# Altium PCB pdb v2.PcbDoc (part 2 of 2)
Units mm, origin at the board's own origin, x right, y up, seen from the top; angles counter-clockwise.
Board outline 131 x 84.21 mm, 4 copper layers (Top Layer, GND, PWR, Bottom Layer); 111 components, 116 nets, 518 pads, 333 vias.
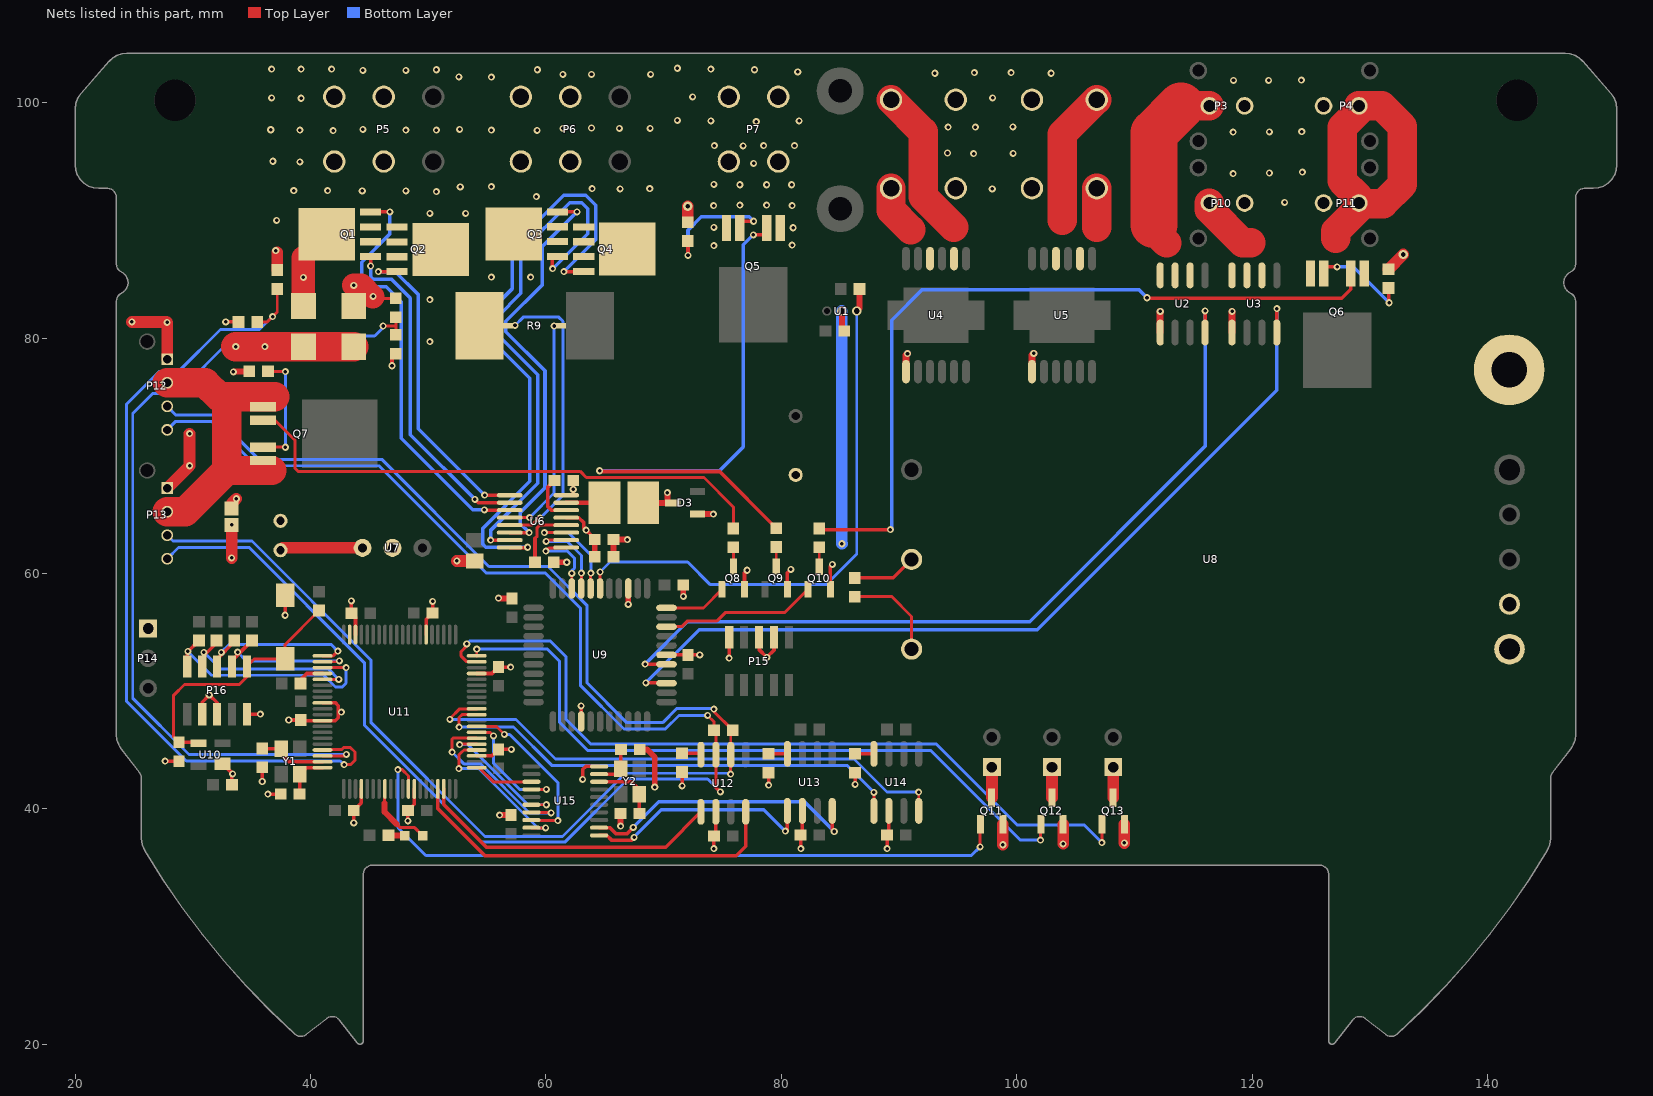
[diagram p4: the nets of this part, all layers, seen from the top]

## Via types
v1: diameter 0.6, hole 0.3, Top Layer to Bottom Layer, 329 vias
v2: diameter 0.8, hole 0.4, Top Layer to Bottom Layer, 2 vias
v3: diameter 3, hole 2, Top Layer to Bottom Layer, 2 vias

## Nets (pads, with @x,y where several pads share a name; then routed paths per layer and width w, separated by ;. In a path a pad name is that pad's centre, name@x,y a point inside that pad or via, vN(x,y) a via of type N, cw(c..) or ccw(c..) an arc to the next point about the centre after c; other vN are vias at no path point) (continued)
EN6: Q8.1 U9.22 | length 5.4
  Top Layer w0.25: U9.22@70.25,57.075 73.4,57.075 Q8.1@74.975,58.65
EN7: Q10.1 U9.20 | length 13.3
  Top Layer w0.25: U9.20@70.25,55.475 71.55,55.475 72.05,55.975 74.554,55.975 75.275,56.696 80.321,56.696 Q10.1@82.275,58.65
EN8: U2.4 U9.16 | length 70.4
  Top Layer w0.3: v1@68.45,52.275 U9.16@70.25,52.275 ; U2.4@116.005,80.475 v1(116.005,82.305)
  Bottom Layer w0.3: v1@68.412,52.312 68.4,52.3 v1(68.425,52.3) 72.025,55.9 101.105,55.9 116.005,70.8 v1(116.005,82.305)
EN9: U3.4 U9.14 | length 74.6
  Top Layer w0.3: v1(68.5,50.7) 70.225,50.7 U9.14@70.25,50.675 ; U3.4@122.105,80.475 v1(122.105,82.495)
  Bottom Layer w0.3: v1(68.5,50.7) 73.025,55.225 101.755,55.225 122.105,75.575 v1(122.105,82.495)
GND: C1.2 C2.1 C4.1 C5.2 C6.2 C7.1 C8.1 C9.2 C10.2 C11.2 C12.2 C13.2 C14.2 C15.2 C16.2 C17.2 C18.2 C19.2 C20.2 C21.2 C22.2 C23.2 C24.2 C25.2 C26.2 C27.2 C28.2 D3.1 NT1.1 P14.1 P15.3 P15.5 P15.9 P16.3 P16.5 P16.9 Q8.2 Q9.2 Q10.2 R23.1 R24.1 R25.1 S1.1 U1.2 U6.8 U7.2 U9.4 U9.17 U9.25 U10.1 U11.9 U11.12 U11.24 U11.33 U11.43 U11.57 U11.66 U11.78 U12.2 U13.2 U14.2 U15.10 | length 110.7
  Top Layer w0.3: v1(27.65,44.05) C16.2@28.825,44.05 ; P16.3@30.794,48.05 30.794,49.069 v1(31.4,49.675) 32.063,49.012 P16.5@32.063,48.05 ; U10.1@32.525,43.84 33.325,43.04 C20.2@33.325,42.05 ; P16.9@34.6,48.05 v1(35.75,48.05) ; v1(35.9,42.325) C18.2@35.9,43.525 ; v1(36.375,41.25) C21.2@37.475,41.25 ; v1(37.85,56.45) S1.1@37.85,58.15 ; v1(38.15,47.55) C14.2@39.175,47.55 ; C14.2@39.225,47.5 U11.12@41.025,47.5 42.1,47.5 42.35,47.75 42.35,48.775 42.125,49 U11.9@41.025,49 ; v1(43.475,57.675) C10.2@43.475,56.625 43.825,56.275 U11.78@43.825,54.8 ; v1(43.675,38.8) C22.2@43.675,39.85 44.325,40.5 U11.24@44.325,41.7 ; v1(48.277,38.977) 48.277,38.827 48.275,38.825 C23.2@48.275,39.85 48.825,40.4 U11.33@48.825,41.7 ; U11.66@49.825,54.8 49.825,56.1 C11.2@50.375,56.65 v1(50.375,57.625) ; U11.43@54.125,44.5 55.425,44.5 C19.2@55.975,45.05 v1(57.075,45.05) ; U11.57@54.125,51.5 55.425,51.5 C15.2@55.975,52.05 v1(57,52.05) ; U6.8@61.725,66.647 62.323,66.647 62.325,66.65 C2.1@62.325,67.9 ; U9.4@63,47.425 v1(63,48.75) ; v1(63.125,42.5) 63.125,43.35 63.375,43.6 U15.10@64.525,43.6 ; U9.17@70.25,53.075 v1(73.075,53.075) ; v1(71.575,41.95) R23.1@71.575,43.125 ; v1(74.275,36.625) C26.2@74.275,37.7 74.44,37.865 U12.2@74.44,39.75 ; v1(75.575,52.8) P15.9@75.575,54.575 ; Q8.2@76.875,58.65 76.875,60.05 v1(77.1,60.275) ; P15.5@78.112,54.575 78.112,53.538 v1(78.775,52.875) 79.381,53.481 P15.3@79.381,54.575 ; v1(78.925,42.025) R24.1@78.925,43.075 ; Q9.2@80.525,58.65 80.525,60.05 v1(80.825,60.35) ; v1(81.675,36.625) 81.675,37.825 81.79,37.94 U13.2@81.79,39.825 ; Q10.2@84.175,58.65 84.175,60.6 v1(84.35,60.775) ; v1(86.275,42.075) R25.1@86.275,43.075 ; v1(89,36.625) 89,37.8 89.14,37.94 U14.2@89.14,39.825
  Top Layer w0.5: v1(55.975,57.9) 56,57.875 C12.2@57.125,57.875 ; v1(56.075,39.475) C24.2@57.025,39.475 ; C7.1@60.675,60.95 v1(61.775,60.95) ; C8.1@65.75,61.425 C4.1@65.75,62.875 v1(66.925,62.875) ; v1(66.35,38.525) C25.2@66.35,39.6 ; v1(67,57.375) U9.25@67,58.725 ; C17.2@67.975,45.05 68.6,45.05 69.25,44.4 v1(69.25,41.85) ; v1(71.675,58.05) C9.2@71.675,59.025 ; D3.1@72.875,65.05 v1(74.225,65.05) ; C1.2@85.145,80.805 U1.2@85.145,82.3
  Top Layer w1: v1(33.3,61.325) v1(33.3,64.125) ; v1(52.436,61.064) C6.2@53.95,61.064
  Bottom Layer w1: U1.2@85.145,82.3 85.145,62.53 v1(85.15,62.525)
  other v1: 33.375,42.975 42.625,48.225 62.325,67.15
MCU_JTAG.TCK: P16.4 R15.1 U11.5 | length 16.3
  Top Layer w0.25: U11.5@41.025,51 v1(42.4,51)
  Top Layer w0.3: P16.4@30.794,52.1 30.794,52.869 R15.1@32.025,54.1
  Bottom Layer w0.25: v1(30.95,53.3) 32.35,51.9 41.5,51.9 v1(42.4,51)
MCU_JTAG.TDI: P16.8 R17.1 U11.2 | length 13.3
  Top Layer w0.25: U11.2@41.025,52.5 42.375,52.5 v1(42.45,52.575)
  Top Layer w0.3: P16.8@33.331,52.1 33.331,52.606 R17.1@35.025,54.3
  Bottom Layer w0.25: v1(33.8,53.325) 34.55,52.575 v1(42.45,52.575)
MCU_JTAG.TDO: P16.6 R16.1 U11.1 | length 14.6
  Top Layer w0.25: U11.1@41.025,53 41.925,53 v1(42.325,53.4)
  Top Layer w0.3: P16.6@32.063,52.1 32.063,52.738 R16.1@33.525,54.2
  Bottom Layer w0.25: v1(32.425,53.3) 33.075,53.95 41.775,53.95 v1(42.325,53.4)
MCU_JTAG.TMS: P16.2 R14.1 U11.3 | length 20.8
  Top Layer w0.25: U11.3@41.025,52 42.688,52 v1(43.025,52)
  Top Layer w0.3: P16.2@29.525,52.1 29.525,53.3 R14.1@30.525,54.3
  Bottom Layer w0.25: v1(29.575,53.375) 31.6,51.35 41.125,51.35 42.125,50.35 42.7,50.35 43.025,50.675 v1(43.025,52)
NetC5_1: C4.2 C5.1 C8.2 D1.2 D2.2 D3.2 L1.1 U6.5 U7.1 | length 25.6
  Top Layer w0.3: U6.5@61.725,64.742 62.807,64.742 63.2,64.35 63.2,63.9 C4.2@64.15,62.95
  Top Layer w0.5: C8.2@64.15,61.425 C4.2@64.15,62.875 C4.2@64.15,62.95 ; L1.1@68.275,66 D3.2@70.775,66 70.325,66 v1(70.325,66.875)
  Top Layer w1: C5.1@37.65,62.175 U7.1@44.425,62.175
  Top Layer w2.5: v1(33.65,79.275) D2.2@43.675,79.275
  other v1: 63.42,63.68 36.125,79.275
NetC9_2: C2.2 U6.6 | length 4.1
  Top Layer w0.3: C2.2@60.725,67.9 60.175,67.35 60.175,65.675 60.473,65.377 U6.6@61.725,65.377
NetC10_2: C7.2 U6.4 | length 5.6
  Top Layer w0.25: 59.075,62.975 59.263,63.163 59.263,63.887 59.482,64.107 U6.4@61.725,64.107
  Top Layer w0.3: C7.2@59.075,60.95 59.075,62.975
NetC29_1: C21.1 U11.20 Y1.2 | length 3.8
  Top Layer w0.3: C21.1@39.1,41.275 Y1.2@39.1,42.925 39.675,43.5 U11.20@41.025,43.5
NetC30_1: C18.1 U11.19 Y1.1 | length 5.4
  Top Layer w0.3: C18.1@35.9,45.125 Y1.1@37.5,45.125 ; Y1.1@37.5,44.65 38.15,44 U11.19@41.025,44
NetD16_1: D4.1 R26.1 | length 1.4
  Top Layer w0.5: R26.1@46.65,37.725 D4.1@48.025,37.725
NetL3_2: L1.2 U6.7 | length 3.3
  Top Layer w0.35: U6.7@61.725,66.012 64.963,66.012 L1.2@64.975,66
NetP3_1: P17.1 Q11.1 | length 2.6
  Top Layer w1: Q11.1@97.9,40.975 P17.1@97.9,43.55
NetP5_2: P12.2 P13.2 Q7.1 Q7.5 | length 25.6
  Top Layer w2.5: P13.2@27.825,65.25 29.375,65.25 32.875,68.75 ; P12.2@27.825,76.2 31.05,76.2 32.225,75.025 36.975,75.025 ; 32.875,74.375 32.875,68.75 ; 36.725,68.75 32.875,68.75
NetP5_3: P12.3 P13.3 R20.2 U12.6 | length 131.8
  Top Layer w0.25: v1(74.268,48.468) 74.268,48.282 R20.2@75.875,46.675 ; v1(75.7,42.95) U12.6@75.7,44.59 ; U12.6@75.71,44.6 R20.2@75.71,46.51
  Bottom Layer w0.25: P13.3@27.825,63.25 28.325,62.75 35.025,62.75 45.125,52.65 45.125,47.35 54.823,37.652 61.403,37.652 66.776,43.025 75.625,43.025 v1(75.7,42.95) ; P12.3@27.825,74.2 28.55,73.475 31.825,73.475 35.6,69.7 46.053,69.7 55.153,60.6 60.178,60.6 63.475,57.303 63.475,50.725 66.875,47.325 69.922,47.325 71.11,48.512 74.223,48.512 v1(74.268,48.468)
NetP5_4: P12.4 P13.4 R20.1 U12.7 | length 131.6
  Top Layer w0.25: v1(73.738,47.937) 74.275,47.4 R20.1@74.275,46.675 ; R20.1@74.44,46.51 U12.7@74.44,44.6 74.44,41.835 v1(74.825,41.45)
  Bottom Layer w0.25: P13.4@27.825,61.25 28.775,62.2 34.797,62.2 44.575,52.422 44.575,47.122 54.497,37.2 61.65,37.2 66.975,42.525 73.75,42.525 v1(74.825,41.45) ; P12.4@27.825,72.2 28.55,72.925 31.597,72.925 35.372,69.15 45.825,69.15 54.925,60.05 59.95,60.05 62.925,57.075 62.925,50.497 66.647,46.775 70.15,46.775 71.312,47.937 v1(73.738,47.937)
NetP8_2: P4.2 P11.2 Q6.1 Q6.5 | length 27
  Top Layer w2.5: 127.125,88.475 127.125,89.1 129.075,91.05 129.075,91.925 127.65,93.35 127.65,97.9 129.075,99.325 P4.2@129.075,99.725 131.025,99.725 132.775,97.975 132.775,93.05 131.15,91.425 P11.2@129.075,91.425
NetP9_2: P7.2 P7.4 Q5.1 Q5.5
  other v1: 74.275,87.85 80.925,87.9 81,89.375 74.275,89.4 74.25,91.25 80.925,91.25 76.475,91.3 78.75,91.3 76.475,93.025 78.75,93.025 80.875,93.025 74.275,93.05 77.65,94.85 76.75,96.325 74.325,96.35 78.5,96.35 81.125,96.35
NetP10_2: P2.2 U5.10 | length 11.5
  Top Layer w2.5: 103.875,90 103.875,97.325 P2.2@106.8,100.25
NetP12_2: P9.2 U5.8 | length 3.3
  Top Layer w2.5: 106.8,89.4 P9.2@106.8,92.725
NetP13_2: P10.2 U3.6 U3.7 U3.8 | length 5.2
  Top Layer w2.5: P10.2@116.375,91.475 116.375,90.925 119.2,88.1 119.875,88.1
NetP14_2: P8.2 U4.10 | length 4.2
  Top Layer w2.5: P8.2@89.325,92.725 89.325,90.875 91,89.2
NetP15_2: P3.2 U2.6 U2.7 U2.8 | length 15.4
  Top Layer w2.5: 111.675,89.65 111.675,89.15 112.75,88.075 ; 113.975,99.725 P3.2@116.375,99.725
  Top Layer w4: 111.675,89.65 111.675,97.425 113.975,99.725
NetP16_2: P1.2 U4.8 | length 13
  Top Layer w2.5: P1.2@89.325,100.25 92.05,97.525 92.05,92.025 94.65,89.425
NetP18_1: P18.1 Q12.1 | length 2.6
  Top Layer w1: Q12.1@103,40.95 P18.1@103,43.55
NetP19_1: P19.1 Q13.1 | length 2.6
  Top Layer w1: Q13.1@108.2,40.95 P19.1@108.2,43.55
NetQ1_1: Q3.1 Q3.2 Q3.3 Q4.1 Q4.2 Q4.3 U6.15 | length 45.4
  Top Layer w0.3: v1(55.3,62.825) U6.15@56.913,62.825 ; v1(60.575,85.9) 60.555,85.92 60.555,86.92 Q3.1@60.975,86.92
  Bottom Layer w0.3: v1@55.3,62.8 v1(55.3,62.825) 55.3,63.65 59.3,67.65 59.3,76.875 55.9,80.275 55.9,81.825 57.875,83.8 57.875,87.35 62.025,91.5 63.05,91.5 63.55,91 63.55,88.875 v1(60.575,85.9)
NetQ1_4: Q4.4 U6.16 | length 52.3
  Top Layer w0.3: U6.16@56.925,62.202 58.428,62.202 v1(58.45,62.225) ; v1(61.53,85.645) Q4.4@63.225,85.645
  Bottom Layer w0.3: v1(58.45,62.225) 54.9,62.225 54.625,62.5 54.625,63.825 58.625,67.825 58.625,76.575 55.175,80.025 55.175,82.225 57.125,84.175 57.125,87.725 61.525,92.125 63.375,92.125 64.225,91.275 64.225,88.34 v1(61.53,85.645)
NetQ2_4: Q3.4 U6.14 | length 35.6
  Top Layer w0.3: U6.14@56.925,63.472 58.572,63.472 v1(58.575,63.475) ; Q3.4@60.975,90.73 v1(62.645,90.73)
  Bottom Layer w0.3: v1(58.575,63.475) 57.825,64.225 57.825,65.175 59.925,67.275 59.925,77.225 56.6,80.55 56.6,81.425 59.675,84.5 59.675,87.76 v1(62.645,90.73)
NetQ2_5: Q2.5 Q3.5 R9.2
  other v1: 50.15,79.7 50.15,83.275 55.375,85.175 58.7,85.175 50.15,90.6 53.175,90.6
NetQ3_1: Q1.1 Q1.2 Q1.3 Q2.1 Q2.2 Q2.3 U6.10 | length 28.3
  Top Layer w0.3: v1(45.1,86.125) Q1.1@45.1,86.915 ; v1(53.975,66.3) 54.263,66.012 U6.10@56.925,66.012
  Bottom Layer w0.3: v1(45.1,86.125) 45.1,85.225 45.343,84.982 46.893,84.982 48.475,83.4 48.475,81.529 48.475,71.8 v1(53.975,66.3)
NetQ3_4: Q1.4 U6.11 | length 35.8
  Top Layer w0.3: Q1.4@45.1,90.725 v1(46.75,90.725) ; v1(54.775,65.4) 54.798,65.377 U6.11@56.925,65.377
  Bottom Layer w0.3: v1(46.75,90.725) 46.75,88.85 44.35,86.45 44.35,85.1 45.1,84.35 46.425,84.35 47.7,83.075 47.7,71.475 53.775,65.4 v1(54.775,65.4)
NetQ4_4: Q2.4 U6.9 | length 27.3
  Top Layer w0.3: v1(45.76,85.64) Q2.4@47.35,85.64 ; v1(54.8,66.65) U6.9@56.923,66.65
  Bottom Layer w0.3: v1(45.76,85.64) 47.21,85.64 49.146,83.704 49.146,72.304 v1(54.8,66.65)
NetQ5_2: Q11.2 U11.32 | length 59.8
  Top Layer w0.25: v1(47.425,43.325) 47.8,43.325 48.325,42.8 U11.32@48.325,41.7 ; v1(96.9,36.775) 96.9,38.675 Q11.2@96.925,38.7
  Bottom Layer w0.25: v1(47.425,43.325) 47.425,38.4 49.8,36.025 96.15,36.025 v1(96.9,36.775)
NetQ6_2: Q6.2 R12.2 | length 66
  Top Layer w0.3: R12.2@83.325,63.725 v1(89.275,63.725) ; v1(111.075,83.425) 111.075,83.375 127.625,83.375 128.39,84.14 Q6.2@128.39,85.5
  Bottom Layer w0.3: v1(89.275,63.725) 89.375,63.725 89.375,81.525 91.975,84.125 110.375,84.125 v1(111.075,83.425)
NetQ6_4: Q6.4 R4.1 | length 8.6
  Top Layer w0.3: Q6.4@126.11,85.5 126.11,86.065 127.21,86.065 v1(127.225,86.05) ; R4.1@131.6,84.25 131.6,83.05 v1(131.65,83)
  Bottom Layer w0.3: v1(127.225,86.05) 128.6,86.05 v1(131.65,83)
NetQ7_3: Q10.3 R12.1 | length 1.7
  Top Layer w0.25: Q10.3@83.225,60.55 R12.1@83.225,62.225
NetQ8_2: Q7.2 R10.2 | length 46.2
  Top Layer w0.25: Q7.2@35.95,73.015 36.985,73.015 38.7,71.3 38.7,68.925 38.95,68.675 62.914,68.675 63.439,68.15 73.425,68.15 75.925,65.65 R10.2@75.925,63.825
NetQ8_4: Q7.4 R7.1 | length 9.8
  Top Layer w0.25: Q7.4@35.95,70.735 37.865,70.735 v1(37.875,70.725) ; R7.1@36.4,77.175 R7.1@36.425,77.175 ; R7.1@36.425,77.15 v1(37.875,77.15)
  Bottom Layer w0.25: v1(37.875,70.725) v1(37.875,77.15)
NetQ9_3: Q8.3 R10.1 | length 1.7
  Top Layer w0.25: Q8.3@75.925,60.55 R10.1@75.925,62.225
NetQ10_2: Q5.2 R11.2 | length 50.4
  Top Layer w0.3: v1(64.561,68.725) 64.561,68.664 74.761,68.664 R11.2@79.575,63.85 ; v1(77.625,88.775) Q5.2@78.765,88.775 ; Q5.2@78.765,88.585 Q5.2@78.765,88.775 ; Q5.2@78.765,89.35 Q5.2@78.765,88.775
  Bottom Layer w0.3: v1(64.561,68.725) 74.75,68.725 76.775,70.75 76.775,87.925 v1(77.625,88.775)
NetQ10_4: Q5.4 R1.1 | length 11.3
  Top Layer w0.3: v1(72.075,87.025) R1.1@72.075,88.225 ; Q5.4@76.485,89.35 76.485,89.915 77.64,89.915 v1(77.65,89.925)
  Bottom Layer w0.3: v1(72.075,87.025) 72.075,89.175 73.2,90.3 77.275,90.3 v1(77.65,89.925)
NetQ11_3: Q9.3 R11.1 | length 1.7
  Top Layer w0.25: Q9.3@79.575,60.55 R11.1@79.575,62.25
NetQ12_2: Q12.2 U11.60 | length 59.6
  Top Layer w0.25: U11.60@54.125,53 v1@54.125,53.575 ; v1(102.025,37.35) Q12.2@102.025,38.675
  Bottom Layer w0.25: v1(54.125,53.575) 60.125,53.575 61.15,52.55 61.15,47.35 63.55,44.95 92.7,44.95 100.3,37.35 v1(102.025,37.35)
NetQ13_2: Q13.2 U11.59 | length 68.6
  Top Layer w0.25: v1(53.275,54.025) 53.275,53.85 52.8,53.375 52.8,52.975 53.275,52.5 U11.59@54.125,52.5 ; v1(107.25,37.125) Q13.2@107.25,38.7
  Bottom Layer w0.25: v1(53.275,54.025) 53.5,54.25 60.375,54.25 61.725,52.9 61.725,47.6 63.8,45.525 93.15,45.525 100.05,38.625 105.75,38.625 v1(107.25,37.125)
NetR1_1: R18.1 U8.2 | length 5.5
  Top Layer w0.3: R18.1@86.25,59.625 89.505,59.625 U8.2@91.075,61.195
NetR2_2: R25.2 U14.8 | length 1.6
  Top Layer w0.3: R25.2@86.275,44.675 U14.8@87.87,44.675
NetR3_2: R24.2 U13.8 | length 1.6
  Top Layer w0.3: R24.2@78.925,44.675 U13.8@80.52,44.675
NetR4_2: R23.2 U12.8 | length 1.5
  Top Layer w0.3: R23.2@71.575,44.725 U12.8@73.045,44.725
NetR6_3: R9.3 U6.12 | length 18.8
  Top Layer w0.25: U6.12@56.925,64.742 58.618,64.742 v1(58.625,64.75)
  Bottom Layer w0.25: v1(58.625,64.75) 60.7,66.825 v1(60.7,81.025)
NetR6_4: R9.4 U6.13 | length 24.9
  Top Layer w0.25: U6.13@56.925,64.107 56.933,64.1 58.788,64.1 59.388,64.7 v1(59.5,64.7)
  Bottom Layer w0.25: v1(57.375,81.075) 58.075,81.775 61.1,81.775 61.45,81.425 61.45,66.65 v1(59.5,64.7)
NetR32_2: R3.2 U1.3 U9.28 | length 48.1
  Top Layer w0.25: U9.28@64.6,58.725 v1(64.6,60.125)
  Top Layer w0.5: U1.3@86.415,82.3 86.65,82.535 R3.2@86.65,84.175
  Bottom Layer w0.25: v1(64.6,60.125) 65.45,60.975 72.05,60.975 73.975,59.05 83.8,59.05 86.415,61.665 U1.3@86.415,82.3
NetR33_1: R19.1 U11.4 | length 2.4
  Top Layer w0.3: R19.1@39.15,50.65 39.15,50.975 39.675,51.5 U11.4@41.025,51.5
NetU2_1: U6.1 U9.31 | length 7.2
  Top Layer w0.25: v1(60,61.9) 60.25,62.15 61.673,62.15 U6.1@61.725,62.202 ; U9.31@62.2,58.725 v1(62.2,60)
  Bottom Layer w0.25: v1(60,61.9) 61.825,61.9 62.425,61.3 62.425,60.45 62.2,60.225 v1(62.2,60)
NetU2_2: U6.2 U9.30 | length 8
  Top Layer w0.25: v1(60.025,62.725) 60.137,62.837 U6.2@61.725,62.837 ; U9.30@63.025,58.75 v1(63.025,60.025)
  Bottom Layer w0.25: v1(60.025,62.725) 61.825,62.725 63.025,61.525 v1(63.025,60.025)
NetU2_3: U6.3 U9.29 | length 9.4
  Top Layer w0.25: v1(59.878,63.478) 59.878,63.472 U6.3@61.725,63.472 ; U9.29@63.8,58.725 63.8,60 v1(63.825,60.025)
  Bottom Layer w0.25: v1(59.878,63.478) 61.898,63.478 63.825,61.55 v1(63.825,60.025)
NetU5_37: U11.37 U12.4 | length 32.7
  Top Layer w0.3: U11.37@50.825,41.7 50.825,40.025 54.825,36.025 76.175,36.025 76.98,36.83 U12.4@76.98,39.75
NetU5_38: U11.38 U12.1 | length 25.9
  Top Layer w0.3: U11.38@51.325,41.7 51.325,40.375 54.95,36.75 70.17,36.75 U12.1@73.17,39.75
NetU5_41: U11.41 U15.13 | length 5.1
  Top Layer w0.25: U11.41@54.125,43.5 54.325,43.5 55.525,42.3 U15.13@58.775,42.3
NetU5_44: U11.44 U15.19 | length 13.5
  Top Layer w0.25: v1(52.6,43.425) 52.6,44.575 52.9,44.875 52.913,44.875 53.038,45 U11.44@54.125,45 ; U15.19@58.8,38.375 v1(59.975,38.375)
  Bottom Layer w0.25: v1(52.6,43.425) 54.275,43.425 59.325,38.375 v1(59.975,38.375)
NetU5_45: U11.45 U15.16 | length 12.2
  Top Layer w0.25: v1(52.675,45.45) 52.725,45.5 U11.45@54.125,45.5 ; U15.16@58.775,40.35 v1(60.05,40.35)
  Bottom Layer w0.25: v1(52.675,45.45) 53.382,45.45 58.482,40.35 v1(60.05,40.35)
NetU5_46: U11.46 U15.17 | length 15.5
  Top Layer w0.25: v1(52.025,44.825) 52.025,45.925 52.125,46.025 54.1,46.025 U11.46@54.125,46 ; U15.17@58.8,39.675 60.476,39.675 v1(60.453,39.652)
  Bottom Layer w0.25: v1(52.025,44.825) 53.025,43.825 54.441,43.825 58.616,39.65 60.451,39.65 v1(60.453,39.652)
NetU5_47: U11.47 U15.14 | length 10.6
  Top Layer w0.25: U11.47@54.125,46.5 55.25,46.5 v1(55.55,46.2) ; U15.14@58.775,41.65 v1(60.05,41.65)
  Bottom Layer w0.25: v1(55.55,46.2) 55.55,43.875 57.775,41.65 v1(60.05,41.65)
NetU5_48: U11.48 U15.18 | length 14.4
  Top Layer w0.25: U11.48@54.125,47 55.8,47 v1(56.475,46.325) ; U15.18@58.775,39.05 58.825,39 v1(61.025,39)
  Bottom Layer w0.25: v1(56.475,46.325) 56.925,46.325 61.028,42.222 61.028,39.414 61.025,39.411 v1(61.025,39)
NetU5_50: U11.50 U14.1 | length 41.5
  Top Layer w0.25: v1(52.625,46.95) 52.625,47.75 52.875,48 U11.50@54.125,48 ; U14.1@87.87,39.825 v1(87.87,41.405)
  Bottom Layer w0.25: v1(52.625,46.95) 57.25,46.95 60.5,43.7 85.575,43.7 v1(87.87,41.405)
NetU5_51: U11.51 U14.4 | length 46.7
  Top Layer w0.25: v1(51.85,47.6) 51.85,47.675 52.675,48.5 U11.51@54.125,48.5 ; v1(91.675,41.425) 91.68,41.42 U14.4@91.68,39.825
  Bottom Layer w0.25: v1(51.85,47.6) 57.45,47.6 60.825,44.225 86.175,44.225 88.975,41.425 v1(91.675,41.425)
NetU6_1: U13.1 U15.1 | length 19.6
  Top Layer w0.3: U15.1@64.525,37.75 65.175,37.75 65.575,37.35 67.275,37.35 v1(67.5,37.575) ; v1(80.35,38.1) 80.52,38.27 U13.1@80.52,39.825
  Bottom Layer w0.3: v1(67.5,37.575) 67.5,37.625 69.8,39.925 78.525,39.925 v1(80.35,38.1)
NetU6_2: U13.4 U15.2 | length 24.2
  Top Layer w0.3: U15.2@64.525,38.4 65.45,38.4 65.95,37.9 66.9,37.9 v1(67.425,38.425) ; U13.4@84.33,39.825 84.33,38.245 v1(84.5,38.075)
  Bottom Layer w0.3: v1(67.425,38.425) 69.6,40.6 81.975,40.6 v1(84.5,38.075)
NRST: C16.1 P16.10 R13.1 S1.2 U10.3 | length 22.3
  Top Layer w0.25: C16.1@28.825,45.65 28.375,46.1 28.375,49.65 29.3,50.575 33.95,50.575 34.6,51.225 P16.10@34.6,52.1 35.25,52.75 S1.2@37.85,52.75 37.85,53.975 R13.1@40.725,56.85
  Top Layer w0.3: C16.1@28.825,45.65 U10.3@30.385,45.65
OSC1: C17.1 U15.9 Y2.2 | length 2.9
  Top Layer w0.3: U15.9@64.525,42.95 Y2.2@65.875,42.95 ; Y2.2@66.35,43.425 C17.1@66.35,45.025
OSC2: C25.1 U15.8 Y2.1 | length 5.7
  Top Layer w0.3: U15.8@64.525,42.3 67.275,42.3 67.95,41.625 Y2.1@67.95,41.225 C25.1@67.95,39.6
PGND: C3.2 E1.1 NT1.2 P1.1 P2.1 P3.1 P4.1 P5.1 P5.2 P6.1 P6.2 P7.1 P7.3 P8.1 P9.1 P10.1 P11.1 P12.1 P13.1 Q11.3 Q12.3 Q13.3 R1.2 R4.2 R5.2 R7.2 R8.2 R18.2 U2.1 U3.1 U4.1 U5.1 U8.3 U8.4 U8.5 | length 39.4
  Top Layer w0.25: R18.2@86.25,58.025 89.4,58.025 91.075,56.35 U8.3@91.075,53.575
  Top Layer w0.3: v1(32.8,81.375) R5.2@33.875,81.375 ; v1(46.925,77.65) 46.925,78.35 R8.2@47.25,78.675
  Top Layer w0.5: v1(33.45,77.125) 33.5,77.175 R7.2@34.8,77.175
  Top Layer w0.6: U4.1@90.6,77.15 90.6,78.55 v1(90.725,78.675) ; U5.1@101.3,77.15 101.3,78.55 v1(101.45,78.7) ; U2.1@112.195,80.475 112.195,82.27 v1(112.2,82.275) ; U3.1@118.295,80.475 118.295,82.27 v1(118.3,82.275)
  Top Layer w1: v1(24.825,81.375) 27.775,81.375 v1(27.825,81.325) P12.1@27.825,78.2 ; P13.1@27.825,67.25 v1(29.725,69.15) v1(29.725,71.875) ; NT1.2@33.3,65.525 33.3,65.95 v1(33.7,66.35) ; R1.2@72.05,89.85 v2(72.05,91.2) ; v1(98.825,36.95) Q11.3@98.825,38.7 ; v1(103.95,37.025) Q12.3@103.95,38.7 ; v1(109.15,37.1) Q13.3@109.15,38.7 ; R4.2@131.6,85.85 v2(132.85,87.1)
  other v1: 122.775,91.525 59.2,92.025 97.925,92.675 52.725,92.85 55.375,92.875 118.4,93.975 121.475,94.025 124.275,94.1 39.1,94.975 36.8,95.025 96.35,95.675 99.7,95.7 94.125,95.725 118.4,97.5 121.475,97.525 124.225,97.55 41.925,97.625 59.25,97.65 39.1,97.675 55.375,97.675 36.625,97.7 52.675,97.725 94.175,97.925 96.5,97.925 99.675,97.95 77.875,98.4 74.025,98.45 81.525,98.45 71.175,98.5 39.2,100.375 36.7,100.4 97.95,100.4 72.475,100.5 118.425,101.9 121.4,101.9 124.2,101.925 55.375,102.175 52.6,102.2 93.05,102.5 102.925,102.5 96.4,102.55 99.525,102.55 81.4,102.625 59.275,102.8 77.725,102.8 36.7,102.85 39.2,102.85 41.8,102.85 74.025,102.85 71.175,102.925
PWR_1_V: D2.1 P6.3 P6.4 Q4.5 R6.2 | length 3.8
  Top Layer w0.25: v1@45.5,83.375 R6.2@47.25,83.375
  Top Layer w2: v1(43.675,84.475) 44.325,84.475 v1@45.287,83.512
  other v1: 45.325,83.55 66.3,92.675 63.925,92.7 68.825,92.7 61.45,97.825 66.25,97.825 68.85,97.825 63.875,97.85 61.45,102.4 63.875,102.4 68.9,102.4
PWR_1_V_SCALED: R6.1 R8.1 U11.18 | length 73.4
  Top Layer w0.25: U11.18@41.025,44.5 42.925,44.5 v1(43.05,44.625) ; v1(46.175,81.025) 46.179,81.029 47.25,81.029 ; R8.1@47.25,80.275 47.25,81.029 ; R6.1@47.25,81.775 47.25,81.029
  Bottom Layer w0.25: v1(43.05,44.625) 29.675,44.625 24.9,49.4 24.9,73.6 26.575,75.275 28.65,75.275 33.55,80.175 45.45,80.175 46.175,80.9 v1(46.175,81.025)
PWR_2_V: D1.1 P5.3 P5.4 Q1.5 R2.2 | length 5.6
  Top Layer w1: R2.2@37.175,85.775 v1@37.175,87.3
  Top Layer w2: D1.1@39.4,82.725 Q1.5@39.4,86.82
  other v1: 39.4,85.15 37.05,87.425 37.125,90 50.7,92.45 44.4,92.5 48.1,92.5 38.575,92.525 41.45,92.525 48.1,97.675 50.7,97.675 44.45,97.725 44.45,102.75 48.1,102.75 50.7,102.8
PWR_2_V_SCALED: R2.1 R5.1 U11.17 | length 70.2
  Top Layer w0.25: R5.1@35.475,81.375 36.325,81.375 v1(36.778,81.828) 37.175,82.225 R2.1@37.175,84.175 ; U11.17@41.025,45 41.052,45.027 42.639,45.027 42.812,45.2 43.4,45.2 43.775,44.825 43.775,44.125 43.4,43.75 v1(42.85,43.75)
  Bottom Layer w0.25: v1(36.778,81.828) 35.675,80.725 32.347,80.725 28.797,77.175 27.175,77.175 24.35,74.35 24.35,49.172 29.447,44.075 42.525,44.075 v1(42.85,43.75)
PWR_OUT_V_SCALED: U11.79
WATCHDOG: D4.2 U11.28 | length 6
  Top Layer w0.25: 46.3,40.475 U11.28@46.3,41.675 ; 47.325,38.7 47.625,38.4 48.85,38.4 D4.2@49.525,37.725
  Top Layer w0.5: 46.3,40.475 46.3,39.725 47.325,38.7
pads on no net: D3. P3. P4. P10. P11. P12. P13. P15.7 P15.10 P16.7 U2.5 U3.5 U4.3 U4.5 U4.7 U4.9 U4.11 U5.3 U5.5 U5.7 U5.9 U5.11 U8.6 U9.5 U9.6 U9.7 U9.8 U9.12 U9.13 U11.11 U11.13 U11.15 U11.22 U11.23 U11.25 U11.26 U11.27 U11.29 U11.30 U11.31 U11.35 U11.36 U11.39 U11.40 U11.53 U11.65 U11.68 U11.74 U11.75 U11.76 U12.5 U13.5 U14.5 U15.3 U15.4 U15.5 U15.6 U15.7 U15.11 U15.12 U15.15 Y1.3 Y1.4 Y2.3 Y2.4

## Polygon pours and split planes (outlines as drawn)
PGND on Top Layer "Top Layer-No Net" (solid, pour order 1002): 103.575,90.525 103.575,103.05 95.75,103.05 92.5,103.05 92.5,90.525
PGND on Top Layer "Top Layer-No Net" (solid, pour order 1001): 118.025,89.675 118.025,102.225 126.375,102.225 127.975,102.225 127.975,89.75
+P5 on Top Layer "Top Layer-No Net" (solid, pour order 1000): 145.5,49.85 133.85,49.85 110.3,73.4 110.3,78.45 126.425,78.45 130.15,82.175 134.65,82.175 134.65,78.425 140.5,72.575 145.5,72.575
+PBAT on Top Layer "Top Layer-No Net" (solid, pour order 1002): 61.8,84.709 61.8,69.3 96.1,69.3 109.6,69.3 109.6,87.025 83.35,87.025 83.35,86.199 80.45,86.199 71.625,86.199 71.625,84.709
PWR_1_V on Top Layer "Top Layer-No Net" (solid, pour order 1000): 69.825,93.55 69.825,103.1 69.8,103.125 69.775,103.1 60.775,103.1 60.775,94.25 63.375,91.65 63.95,91.075 69.575,91.075
PWR_2_V on Top Layer "Top Layer-No Net" (solid, pour order 1001): 48.125,103.125 51.5,103.125 51.5,91.925 47.775,91.925
PGND on GND (split plane): 459 vertices, not listed, extent 20.502,20.89 150.498,103.71
GND on GND (split plane): 165 vertices, not listed, extent 24.002,20.89 93.523,68.498
NetP9_2 on GND (split plane): 81.698,87.352 73.727,87.352 73.727,96.573 81.698,96.573
+3.3 on PWR (split plane): 308 vertices, not listed, extent 24.002,20.89 146.998,73.193
+PBAT on PWR (split plane): 109.598,73.654 99.921,63.977 82.029,63.977 76.853,69.153 76.801,69.193 76.74,69.219 76.675,69.227 58.352,69.227 58.352,75.446 62.803,79.897 62.843,79.949 62.869,80.01 62.877,80.075 62.877,84.573 70.175,84.573 70.24,84.581 70.301,84.607 70.353,84.647 70.393,84.699 70.419,84.76 70.427,84.825 70.427,103.71 109.598,103.71
+P5 on PWR (split plane): 134.873,82.275 134.881,82.21 134.907,82.149 134.947,82.097 134.999,82.057 135.06,82.031 135.125,82.023 146.998,82.023 146.998,50.102 133.654,50.102 110.102,73.654 110.102,103.71 134.873,103.71
NetC5_1 on PWR (split plane): 34.923,81.05 34.931,80.985 34.957,80.924 34.997,80.872 35.049,80.832 35.11,80.806 35.175,80.798 41.446,80.798 46.872,75.372 46.894,75.354 46.924,75.332 46.985,75.306 47.05,75.298 57.848,75.298 57.848,68.975 57.856,68.91 57.882,68.849 57.922,68.797 57.974,68.757 58.035,68.731 58.1,68.723 76.571,68.723 78.249,67.045 72.856,61.652 59.829,61.652 56.153,65.328 56.101,65.368 56.04,65.394 55.975,65.402 46.85,65.402 46.785,65.394 46.724,65.368 46.672,65.328 46.632,65.276 46.606,65.215 46.598,65.15 46.598,59.602 24.002,59.602 24.002,81.998 34.923,81.998
PWR_1_V on PWR (split plane): 69.923,85.077 62.625,85.077 62.56,85.069 62.499,85.043 62.447,85.003 62.407,84.951 62.381,84.89 62.373,84.825 62.373,80.179 57.996,75.802 47.154,75.802 41.802,81.154 41.802,85.673 44.55,85.673 44.615,85.681 44.676,85.707 44.728,85.747 44.768,85.799 44.794,85.86 44.802,85.925 44.802,91.123 47.948,91.123 47.948,77.75 47.956,77.685 47.982,77.624 48.022,77.572 48.074,77.532 48.135,77.506 48.2,77.498 56.975,77.498 57.04,77.506 57.101,77.532 57.153,77.572 57.193,77.624 57.219,77.685 57.227,77.75 57.227,83.073 59.85,83.073 59.915,83.081 59.976,83.107 60.028,83.147 60.068,83.199 60.094,83.26 60.102,83.325 60.102,84.825 60.102,103.71 69.923,103.71
no net on PWR (split plane): 151 vertices, not listed, extent 135.377,82.527 150.498,103.71
PWR_2_V on PWR (split plane): 51.548,91.627 44.55,91.627 44.485,91.619 44.424,91.593 44.372,91.553 44.332,91.501 44.306,91.44 44.298,91.375 44.298,86.177 41.55,86.177 41.485,86.169 41.424,86.143 41.372,86.103 41.332,86.051 41.306,85.99 41.298,85.925 41.298,81.302 35.427,81.302 35.427,85.925 35.427,103.71 51.548,103.71
no net on PWR (split plane): 34.923,85.925 34.923,82.502 24.002,82.502 24.002,83.103 24.012,83.186 24.03,83.238 24.059,83.285 24.099,83.323 24.194,83.382 24.385,83.501 24.391,83.506 24.397,83.509 24.43,83.535 24.463,83.561 24.468,83.567 24.474,83.571 24.633,83.73 24.638,83.735 24.644,83.74 24.669,83.773 24.696,83.806 24.7,83.812 24.704,83.818 24.825,84.008 24.828,84.015 24.832,84.021 24.85,84.059 24.869,84.096 24.871,84.103 24.874,84.11 24.949,84.322 24.95,84.329 24.953,84.336 24.962,84.377 24.972,84.418 24.972,84.425 24.974,84.432 24.999,84.656 24.999,84.664 25.001,84.671 25,84.713 25.001,84.755 24.999,84.762 24.999,84.769 24.974,84.993 24.972,85 24.972,85.007 24.962,85.048 24.953,85.089 24.95,85.096 24.949,85.103 24.874,85.315 24.871,85.322 24.869,85.329 24.85,85.367 24.832,85.405 24.828,85.411 24.825,85.417 24.704,85.607 24.7,85.613 24.696,85.62 24.669,85.652 24.644,85.685 24.638,85.69 24.633,85.696 24.474,85.854 24.468,85.859 24.463,85.864 24.43,85.89 24.397,85.916 24.391,85.92 24.385,85.924 24.194,86.043 24.099,86.102 24.059,86.141 24.03,86.187 24.012,86.239 24.002,86.322 24.002,91.963 24,91.991 23.999,92.019 23.98,92.186 23.979,92.193 23.979,92.2 23.969,92.241 23.96,92.282 23.957,92.289 23.955,92.296 23.9,92.454 23.897,92.46 23.895,92.467 23.876,92.505 23.858,92.543 23.854,92.549 23.851,92.555 23.762,92.698 23.757,92.703 23.754,92.709 23.727,92.742 23.701,92.775 23.696,92.78 23.692,92.786 23.573,92.904 23.567,92.909 23.563,92.914 23.529,92.94 23.497,92.967 23.49,92.97 23.485,92.974 23.343,93.064 23.336,93.067 23.331,93.071 23.292,93.089 23.255,93.108 23.248,93.11 23.241,93.113 23.083,93.168 23.076,93.17 23.069,93.173 23.028,93.181 22.987,93.191 22.98,93.192 22.973,93.193 22.806,93.212 22.778,93.212 22.75,93.215 22.028,93.215 21.667,93.256 21.352,93.366 21.068,93.544 20.832,93.781 20.654,94.064 20.543,94.38 20.502,94.741 20.502,99.431 20.549,99.816 20.674,100.15 20.893,100.47 23.263,103.179 23.516,103.412 23.79,103.574 24.092,103.674 24.434,103.71 34.923,103.71
NetQ2_5 on PWR (split plane): 59.598,84.825 59.598,83.577 56.975,83.577 56.91,83.569 56.849,83.543 56.797,83.503 56.757,83.451 56.731,83.39 56.723,83.325 56.723,78.002 48.452,78.002 48.452,91.123 59.598,91.123
+PBAT on PWR (split plane): 59.598,91.627 52.052,91.627 52.052,103.71 59.598,103.71
NetP9_2 on PWR (split plane): 81.698,87.327 73.702,87.327 73.702,96.823 81.698,96.823

## Other copper
Top Layer:
  rectangle net +PBAT: 95.975,44.875 110.125,69.625
  rectangle net +PBAT: 85.8,64.475 96.425,73.675
  rectangle net PGND: 94.625,91.582 96.575,94.225
  rectangle net PGND: 99.225,91.15 102.45,94.225
  rectangle net PGND: 93.25,98.6 96.65,102
  rectangle net PGND: 99.625,98.6 102.875,101.9
  rectangle net PGND: 118.025,96.1 119.5,98.265
  rectangle net PGND: 120.7,96.3 122.575,98.45
  rectangle net PGND: 119.15,90.375 120.75,92.8
  rectangle net PGND: 124.75,90.275 126.225,92.625
  rectangle net PGND: 124.625,98.848 126.31,101.15
  rectangle net PGND: 126.5,99.35 126.55,99.375
  rectangle net PGND: 118.075,97.2 121.875,102.2
  rectangle net PGND: 70.725,97.775 82.25,103.575
  rectangle net +P5: 123.4,73.9 125.65,78.475
  rectangle net +P5: 139.85,66.75 144,70.775
  rectangle net +P5: 124.35,75.05 130.825,82.175
  rectangle net +PBAT: 39.275,69.275 64.3,77.125
  rectangle net NetP9_2: 73.675,88.25 75.7,91.7
  rectangle net NetP9_2: 79.5,88.25 81.7,91.85
  rectangle net NetP15_2: 113.2,85.25 113.75,87.675
  rectangle net NetP15_2: 111.925,85.225 112.475,87.65
  rectangle net NetP13_2: 120.55,85.275 121.1,88.075
  rectangle net NetP13_2: 119.275,85.275 119.825,87.7
  rectangle net NetP13_2: 118.025,85.3 118.575,87.725
  rectangle net NetQ2_5: 48.65,78.2 56.375,91.075
  rectangle net NetQ2_5: 56.3,83.9 59.65,86.625
  rectangle net PGND: 52.15,91.775 59.65,103.15
  rectangle net PGND: 36,94.425 42.225,103.15
  rectangle net NetQ3_1: 44.225,86.625 48.25,89.75
  rectangle net NetQ1_1: 60.075,86.625 64.125,89.75
  rectangle net PWR_1_V: 60.2,91.65 63.375,94.25
  rectangle net PWR_2_V: 36,86.525 43.425,93.725
  rectangle net PWR_1_V: 64.525,85.2 69.825,93.55
  rectangle net +PBAT: 70.8,84.05 80.975,86.2
  rectangle net +PBAT: 61.8,78.175 80.475,84.15
  rectangle net +PBAT: 61.8,76.85 66.15,79.525
  rectangle net +PBAT: 79.675,77.925 81.55,85.975
  rectangle net +PBAT: 95.4,75.7 96.475,77.875
  rectangle net +PBAT: 89.45,85.8 90.775,87.725
  rectangle net +PBAT: 100.325,85.775 101.6,87.75
  rectangle net +PBAT: 106.075,75.8 106.975,78.125
  rectangle net +PBAT: 106.75,80.55 108.129,83.35
  rectangle net +PBAT: 99.571,80.55 100.95,83.35
  rectangle net +PBAT: 96.05,80.55 97.429,83.35
  rectangle net +PBAT: 88.871,80.55 90.25,83.35
  rectangle net PWR_1_V: 65.575,96.775 69.5,98.425
  rectangle net PWR_1_V: 68.05,101.7 69.825,103.05
  rectangle net PWR_2_V: 47.375,91.925 51.5,93.35
  rectangle net PWR_2_V: 49.825,96.975 51.5,98.21
  rectangle net PWR_2_V: 49.675,102.025 51.5,103.125
  pour cut-out: 82.8,87.45 87.4,87.45 87.4,79.9 82.8,79.9
  region net NetP8_2: 129.725,84.425 130.375,84.425 130.375,86.35 134,89.975 134,93.05 133.925,93.05 131.025,90.15 131.025,88.1 130.4,87.475 129.1,87.475 129.1,86.65 129.725,86.025
  region net NetP9_2: 75.7,88.25 76,87.95 79.2,87.95 79.5,88.25 81.7,88.25 81.7,87.25 73.7,87.25 73.675,87.275 73.675,88.25
  region net NetP9_2: 80.325,89.25 80.325,90.475 81.7,91.85 81.7,96.8 81.675,96.825 73.675,96.825 73.675,91.7 74.95,90.425 74.95,90.25 75.7,90.25 75.7,90.45 76.05,90.8 79.15,90.8 79.525,90.425 79.525,89.25
  region net NetP8_2: 129.15,85.5 129.15,86.6 128.875,86.875 125.35,86.875 125.1,87.125 126.775,88.8 128,88.8 129.925,86.875 129.925,86.125
  region net NetP8_2: 124.575,85.475 124.575,88.3 126.3,90.025 127.125,89.2 127.125,88.375 125.325,86.575 125.325,85.475
  region net NetP15_2: 114.45,85.3 114.45,86.275 113.55,87.175 113.55,87.95 113.975,87.95 115,86.925 115,85.59 114.735,85.325
  region net NetP14_2: 92.975,86.625 92.975,88.975 91.325,90.625 90.975,90.275 90.975,87.95 92.075,87.95 92.325,87.7 92.325,87.065 92.64,86.75
  region net NetP16_2: 94.325,86.725 94.325,87.975 93.725,88.575 94.975,89.825 95.475,89.825 95.875,89.425 95.875,88.575 94.975,87.675 94.975,86.75
  region net NetP12_2: 105.05,86.75 105.05,89.1 105.7,89.75 106.425,89.75 107.05,89.125 105.7,87.775 105.7,86.75
  region net NetP10_2: 103.675,86.725 103.675,87.65 104.05,88.025 104.725,88.025 104.725,89.375 103.575,90.525 102.625,90.525 102.625,88.05 103.025,87.65 103.025,86.9 103.19,86.9 103.34,86.75
  region net PWR_1_V: 64.525,89.75 64.525,89.925 60.2,94.25 60.2,103.125 64.325,103.125 64.35,103.1 64.35,94.775 65.6,93.525 67.825,93.525 69.3,92.05 69.3,88.425 64.55,88.425
  region net PWR_2_V: 43.775,89.9 43.775,91.2 44.475,91.9 48,91.9 48.875,92.775 48.875,103.1 48.85,103.125 43.5,103.125 43.5,94.525 42.65,93.675 38.95,93.675 38.95,89.899
  pour cut-out: 90.25,86.1 95.975,86.1 95.975,84.15 90.25,84.15
  pour cut-out: 90.313,79.85 96.038,79.85 96.038,77.9 90.313,77.9
  pour cut-out: 100.963,79.775 106.688,79.775 106.688,77.825 100.963,77.825
  pour cut-out: 101.013,86.025 106.738,86.025 106.738,84.075 101.013,84.075
GND (plane layer: these items are gaps in the copper):
  lines w0.5: 23.5,65.175 35.6,65.175 39.175,68.75 76.95,68.75 82.025,63.675 86.45,63.675 88.1,62.025 88.1,52.925 ; 88.1,53.925 88.1,52.925 ; 93.775,35.213 93.775,48.75 91.8,50.725 90.3,50.725 88.1,52.925 ; 73.475,87.1 81.95,87.1 81.95,96.825 73.475,96.825 73.475,87.1
PWR (plane layer: these items are gaps in the copper):
  lines w0.5: 23.5,59.35 46.85,59.35 46.85,65.15 55.975,65.15 59.725,61.4 72.96,61.4 78.605,67.045 ; 23.5,82.25 35.175,82.25 ; 35.175,104.213 35.175,85.925 35.175,81.05 41.55,81.05 ; 48.2,91.375 48.2,77.75 56.975,77.75 56.975,83.325 59.85,83.325 59.85,84.825 59.85,104.213 ; 51.8,104.213 51.8,91.375 ; 59.85,91.375 51.8,91.375 ; 70.1,84.825 70.175,84.825 ; 70.175,104.213 70.175,84.825 ; 109.675,104.213 109.85,104.213 109.85,73.55 ; 135.125,104.213 135.125,82.275 147.5,82.275 ; 147.5,49.85 133.55,49.85 109.85,73.55 ; 41.55,81.05 47.05,75.55 58.1,75.55 ; 41.55,81.05 41.55,85.925 44.55,85.925 44.55,91.375 51.8,91.375 ; 58.1,75.55 58.1,68.975 76.675,68.975 81.925,63.725 100.025,63.725 109.85,73.55 ; 58.1,75.55 62.625,80.075 62.625,84.825 70.175,84.825 ; 73.45,87.075 81.95,87.075 81.95,97.075 73.45,97.075 73.45,87.075

## Silkscreen, mask and mechanical layers (free items; w line width, h text height)
Top Overlay:
  drawing of 211 lines, arcs and shapes, not listed
  text "PDB" at 66.898,73.514 h4
  text "CAN OUT" at 33.198,71.125 h2 r90
  text "V 3.0.0" at 66.898,70.864 h2.6
  text "CAN IN" at 33.2,61.225 h2 r90
  text "© 2013 JAMES BUCKLEY" at 130.186,47.999 h1.4
  text "FANS" at 113.75,37.7 h4 r90
  text "WATCHDOG" at 32.625,36.625 h2

## Text inside footprints (layer, text, board x,y; h text height)
P1: Top Overlay "1" at 95.45,102.125 h2 r270; Top Overlay "2" at 90.325,102.25 h2 r270
P2: Top Overlay "1" at 100.675,98.375 h2 r90; Top Overlay "2" at 105.8,98.25 h2 r90
P3: Top Overlay "Micro-Fit 3.0" at 121.325,96.65 h1.2 r90; Top Overlay "1" at 118.85,98.25 h1.5 r90; Top Overlay "2" at 117.325,100.8 h1.5 r90
P4: Top Overlay "Micro-Fit 3.0" at 124.125,102.8 h1.2 r270; Top Overlay "1" at 126.6,101.2 h1.5 r270; Top Overlay "2" at 128.125,98.65 h1.5 r270
P5: Top Overlay "Mini-Fit Jr." at 40.125,97 h2.8; Top Overlay "1" at 39.925,100.9 h2; Top Overlay "3" at 44.125,100.9 h2; Top Overlay "5" at 48.425,100.9 h2; Top Overlay "2" at 39.925,95.3 h2; Top Overlay "4" at 44.125,95.3 h2; Top Overlay "6" at 48.425,95.2 h2
P6: Top Overlay "Mini-Fit Jr." at 55.975,97 h2.8; Top Overlay "1" at 55.775,100.9 h2; Top Overlay "3" at 59.975,100.9 h2; Top Overlay "5" at 64.275,100.9 h2; Top Overlay "2" at 55.775,95.3 h2; Top Overlay "4" at 59.975,95.3 h2; Top Overlay "6" at 64.275,95.2 h2
P7: Top Overlay "Mini-Fit Jr." at 73.3,97.175 h2; Top Overlay "1" at 73.575,101.025 h2; Top Overlay "3" at 77.725,101.05 h2; Top Overlay "2" at 73.475,95.375 h2; Top Overlay "4" at 77.725,95.325 h2
P8: Top Overlay "1" at 95.45,94.6 h2 r270; Top Overlay "2" at 90.325,94.725 h2 r270
P9: Top Overlay "1" at 100.675,90.85 h2 r90; Top Overlay "2" at 105.8,90.725 h2 r90
P10: Top Overlay "Micro-Fit 3.0" at 121.325,88.4 h1.2 r90; Top Overlay "1" at 118.85,90 h1.5 r90; Top Overlay "2" at 117.325,92.55 h1.5 r90
P11: Top Overlay "Micro-Fit 3.0" at 124.125,94.55 h1.2 r270; Top Overlay "1" at 126.6,92.95 h1.5 r270; Top Overlay "2" at 128.125,90.4 h1.5 r270
P12: Top Overlay "JST  PA" at 26.925,72.7 h1.5 r90
P13: Top Overlay "JST  PA" at 26.925,61.75 h1.5 r90
P15: Top Overlay "1" at 81.375,54.075 h1; Top Overlay "2" at 81.375,50.125 h1; Top Overlay "9" at 74.15,54.075 h1; Top Overlay "10" at 73.325,50.125 h1
P16: Top Overlay "1" at 28.25,47.575 h1; Top Overlay "2" at 28,51.625 h1
U7: Top Overlay "DC-DC" at 42.125,64.375 h3.5
U8: Top Overlay "VI+" at 93.475,67.995 h2.5; Top Overlay "VI-" at 93.475,52.795 h2.5; Top Overlay "ON/OFF" at 93.475,60.395 h2.5; Top Overlay "VO+" at 134.843,67.895 h2.5; Top Overlay "VO-" at 135.326,52.595 h2.5; Top Overlay "SENSE+" at 130.575,64.315 h2.5; Top Overlay "SENSE-" at 131.075,56.815 h2.5; Top Overlay "TRIM" at 134.033,60.215 h2.5